# EAGLE board gps_fe_v2 (EAGLE 7.5.0)
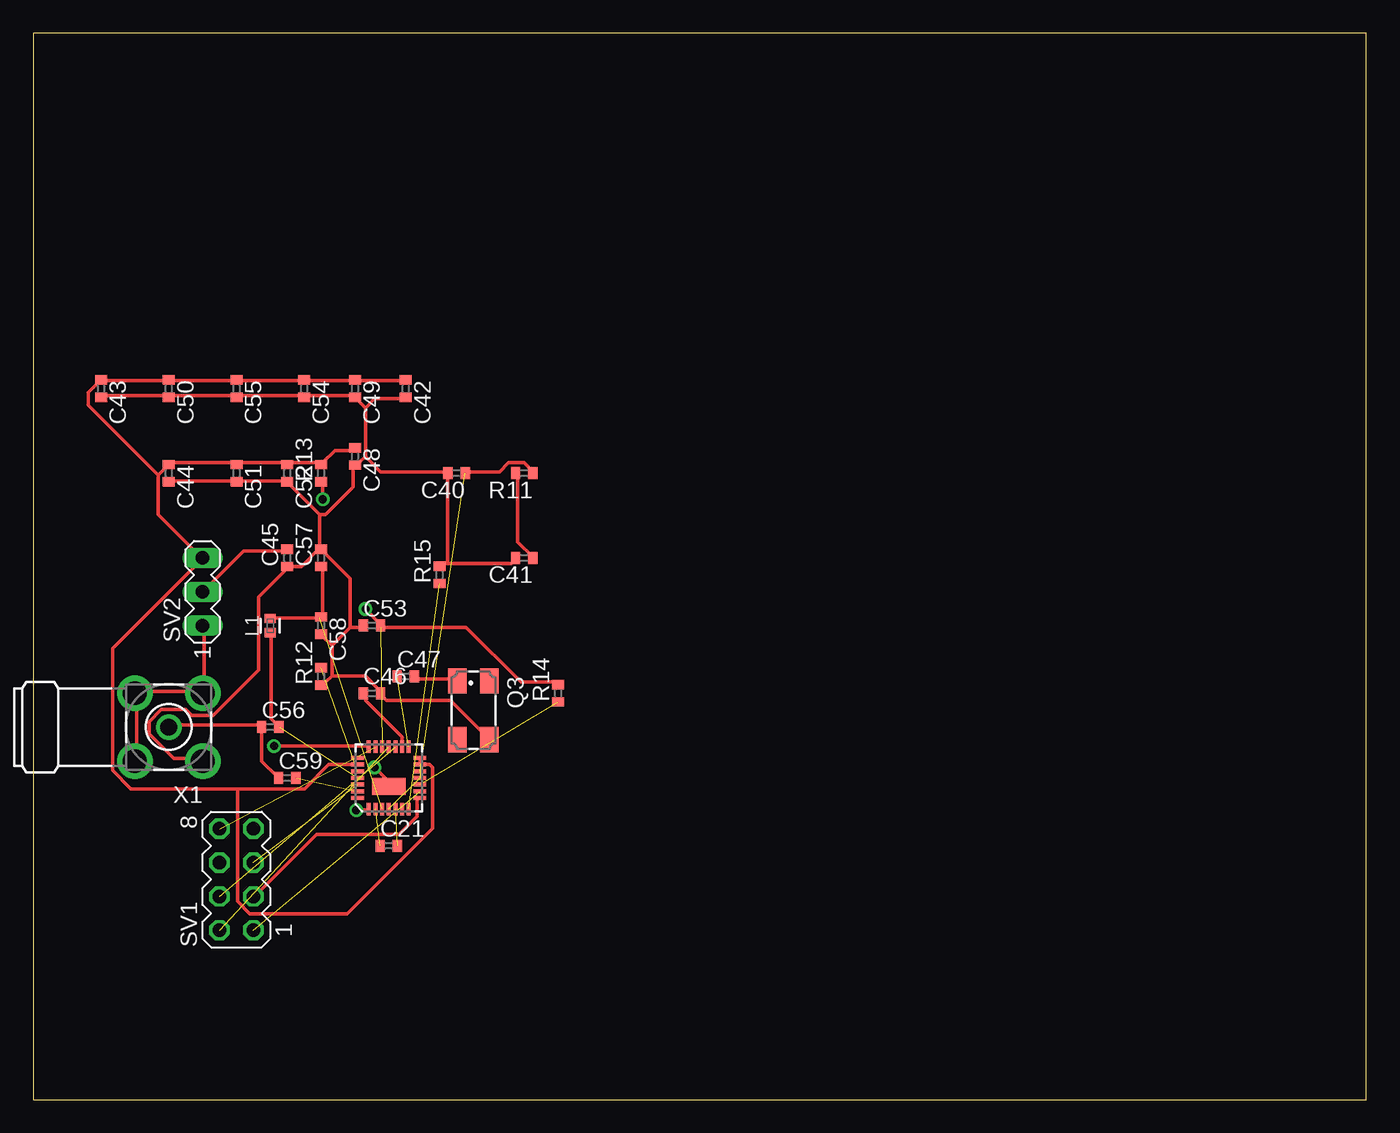
[diagram p0: board, top side]
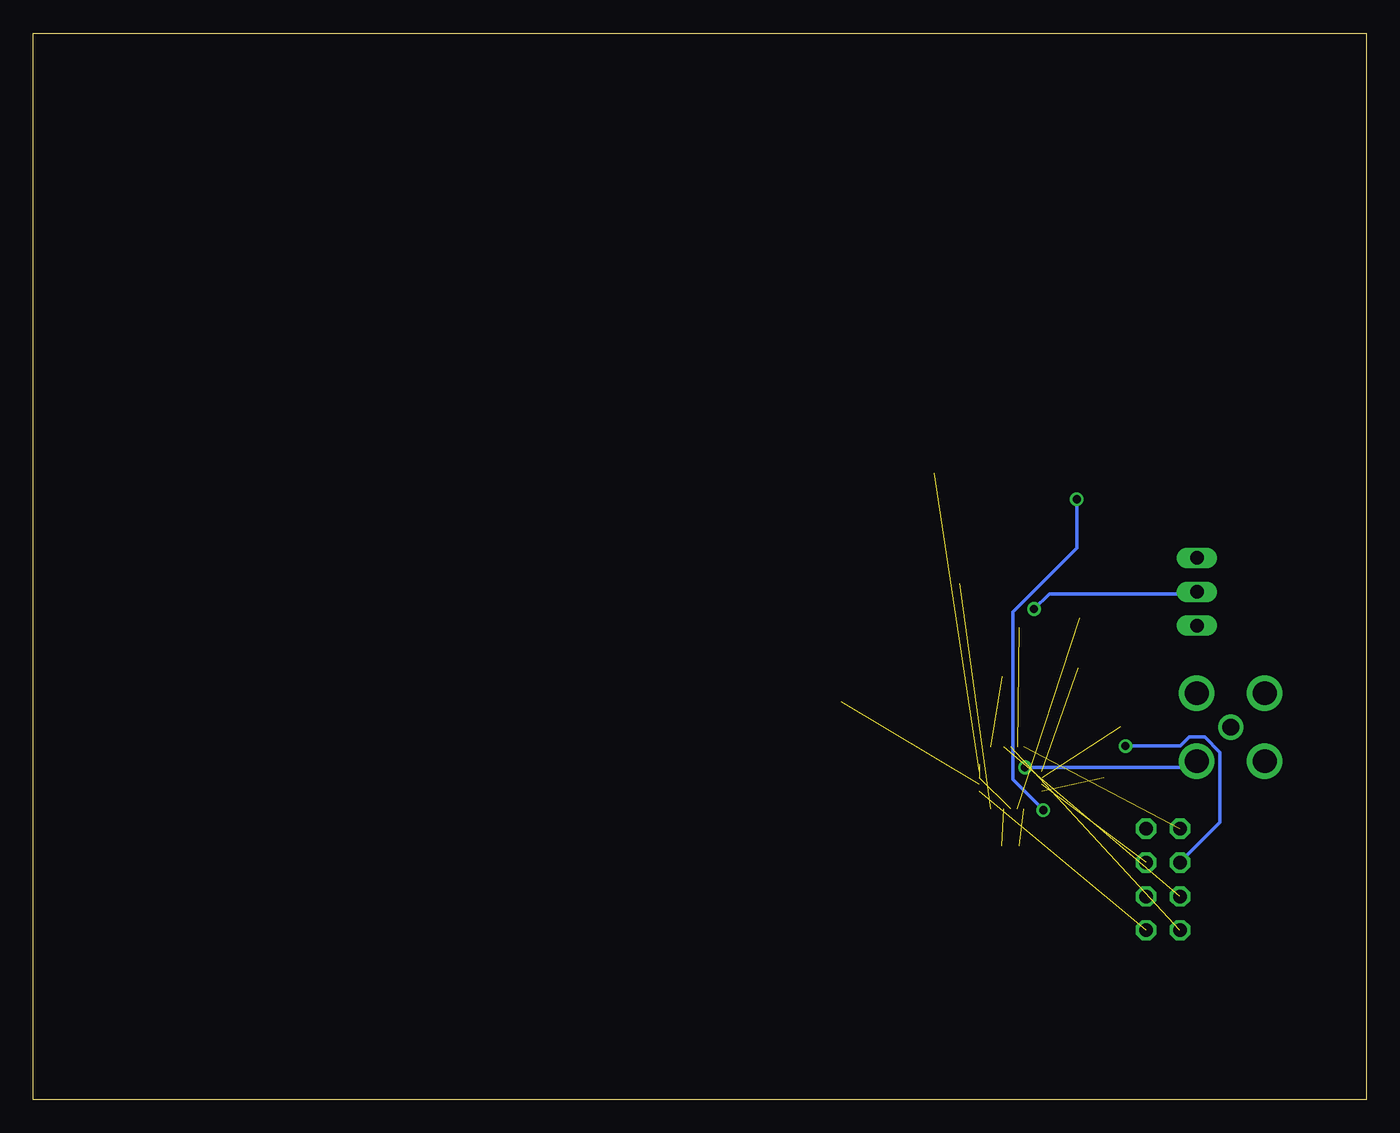
[diagram p1: board, bottom side, seen from below]

Size 100 x 80 mm. Coordinates in mm from the lower left corner, seen from the top.
Outline: 0,0 100,0 100,80 0,80 0,0
Copper layers (1*16): Top 0.035mm / dielectric 1.5mm / Bottom 0.035mm
Design rules "default": minimum track width 10mil, minimum drill 24mil, track to track 8mil, track to pad 8mil, pad to pad 8mil, via to via 8mil, smd to smd 8mil, copper to edge 40mil, drill to drill 8mil, minimum pad ring 10mil, minimum via ring 8mil, stop-mask expansion 4mil, vias tented up to drill 0mil, thermal gap 10mil

## Footprints (pad centres in the part's own frame; a part is rotated, then mirrored left to right if it is on the bottom)
C0402 = smd 0.7 x 0.9: 1 -0.65,0; 2 0.65,0
0402-A = smd 0.69 x 0.82: 1 -0.53,0; 2 0.53,0
CTS406 = smd 1.9 x 1.4: 1 -2.2,-1.2; 2 2.2,-1.2; 3 2.2,1.2; 4 -2.2,1.2
R0402 = smd 0.7 x 0.9: 1 -0.65,0; 2 0.65,0
MA04-2 = drill 1.016 octagon: 1 -3.81,-1.27; 2 -3.81,1.27; 3 -1.27,-1.27; 4 -1.27,1.27; 5 1.27,-1.27; 6 1.27,1.27; 7 3.81,-1.27; 8 3.81,1.27
MA03-1 = drill 1.016 long: 1 -2.54,0; 2 0,0; 3 2.54,0
90-0023 = smd 0.3 x 0.95: 1 -1.5,-2.34; 2 -1,-2.34; 3 -0.5,-2.34; 4 0,-2.34; 5 0.5,-2.34; 6 1,-2.34; 7 1.5,-2.34; 15 1.5,2.34; 16 1,2.34; 17 0.5,2.34; 18 0,2.34; 19 -0.5,2.34; 20 -1,2.34; 21 -1.5,2.34 | smd 0.95 x 0.3: 8 2.34,-1.5; 9 2.34,-1; 10 2.34,-0.5; 11 2.34,0; 12 2.34,0.5; 13 2.34,1; 14 2.34,1.5; 22 -2.34,1.5; 23 -2.34,1; 24 -2.34,0.5; 25 -2.34,0; 26 -2.34,-0.5; 27 -2.34,-1; 28 -2.34,-1.5 | smd 2.54 x 1.27: BODY 0,-0.635
BU-SMA-H = drill 1.27: 1 0,0 | drill 1.778: 2 -2.55,2.55; 3 2.55,2.55; 4 2.55,-2.55; 5 -2.55,-2.55

## Placement (x,y rotation side)
C21  0.47nF  [C0402]  26.67,19.05 0 top
C40  27pF  [C0402]  31.75,46.99 180 top
C41  470pF  [C0402]  36.83,40.64 180 top
C42  0.1uF  [C0402]  27.94,53.34 270 top
C43  0.1nF  [C0402]  5.08,53.34 270 top
C44  0.1uF  [C0402]  10.16,46.99 270 top
C45  0.1uF  [C0402]  19.05,40.64 90 top
C46  10nF  [C0402]  25.4,30.48 0 top
C47  23pF  [C0402]  27.94,31.75 0 top
C48  0.1uF  [C0402]  24.13,48.26 270 top
C49  0.1nF  [C0402]  24.13,53.34 270 top
C50  0.1uF  [C0402]  10.16,53.34 270 top
C51  0.1nF  [C0402]  15.24,46.99 270 top
C52  0.1nF  [C0402]  19.05,46.99 270 top
C53  0.1nF  [C0402]  25.4,35.56 0 top
C54  0.1uF  [C0402]  20.32,53.34 270 top
C55  0.1nF  [C0402]  15.24,53.34 270 top
C56  6.8nF  [C0402]  17.78,27.94 0 top
C57  0.1uF  [C0402]  21.59,40.64 90 top
C58  0.1nF  [C0402]  21.59,35.56 270 top
C59  6.8nF  [C0402]  19.05,24.13 0 top
L1  33nH  [0402-A]  17.78,35.56 90 top
Q3  16.368MHz  [CTS406]  33.02,29.21 270 top
R11  20k  [R0402]  36.83,46.99 180 top
R12  20k  [R0402]  21.59,31.75 90 top
R13  20k  [R0402]  21.59,46.99 90 top
R14  20k  [R0402]  39.37,30.48 90 top
R15  20k  [R0402]  30.48,39.37 90 top
SV1  [MA04-2]  15.24,16.51 90 top
SV2  [MA03-1]  12.7,38.1 90 top
U2  MAX2769  [90-0023]  26.67,24.13 0 top
X1  BU-SMA-H  [BU-SMA-H]  10.16,27.94 180 top

## Library data of the parts
C21 C40-C59 R11-R15 = rcl
L1 = rcl_custom
Q3 = crystal; OC_FARNELL: unknown; OC_NEWARK: unknown
SV1 SV2 = con-lstb; OC_FARNELL: unknown; OC_NEWARK: unknown
U2 = wicker
X1 = con-coax; OC_FARNELL: unknown; OC_NEWARK: unknown

## Nets
3.3VA: C42.1 C43.1 C44.1 C48.1 C49.1 C50.1 C51.1 C52.1 C54.1 C55.1 R13.2 SV2.3 U2.4 U2.11 U2.13 U2.14 U2.23
3.3VD: C45.2 C53.2 R14.2 SV2.2 U2.19
ANTBIAS: C57.1 C58.1 L1.2 U2.3
ANTFLAG: R13.1 U2.1
BAR_GND: C40.2 C41.2 C42.2 C43.2 C44.2 C45.1 C46.2 C48.2 C49.2 C50.2 C51.2 C52.2 C53.1 C54.2 C55.2 C57.2 C58.2 Q3.3 R12.1 R15.2 U2.BODY X1.2
CLKOUT: C46.1 U2.16
CPOUT: C40.1 R11.1 U2.12
GND: SV2.1 X1.3 X1.4 X1.5
LNA3: C59.2 U2.27
LNA4: C56.2 L1.1 U2.25
LNAOUT1: C21.1 U2.2
N$1: SV1.5 U2.26
N$2: C41.1 R11.2
N$3: SV1.7
N$4: SV1.8 U2.20
N$5: SV1.6 U2.21
N$6: SV1.4 U2.17
N$7: R14.1 U2.10
N$8: SV1.2 U2.18
N$9: SV1.1 U2.9
N$10: SV1.3 U2.8
N$14: C47.2 Q3.1
N$15: C56.1 C59.1 X1.1
N$16: R15.1 U2.7
N$17: R12.2 U2.24
N$19: C21.2 U2.5
N$20: C47.1 U2.15

## Tracks (layer width: path | path; a pad name or v marks a point on that pad's centre or on a via)
3.3VA  (2 unrouted)
  Top 0.254: C42.1 27.89,53.95 24.23,53.95 C49.1 24,53.95 20.34,53.95 C54.1 20.12,53.95 15.32,53.95 C55.1 15.09,53.95 10.29,53.95 C50.1 10.06,53.95 5.26,53.95 C43.1 5.03,53.95 4.12,53.03 4.12,52.12 9.37,46.86 | C48.1 24,48.69 22.63,48.69 21.72,47.78 R13.2 21.49,47.78 19.2,47.78 C52.1 18.97,47.78 15.32,47.78 C51.1 15.09,47.78 10.29,47.78 C44.1 10.06,47.55 9.37,46.86 | 29.03,25.15 29.03,25.6 U2.14 | 15.32,23.32 7.32,23.32 5.94,24.69 5.94,33.83 12.57,40.46 SV2.3 12.57,40.69 9.37,43.89 9.37,46.86 | 15.32,23.32 20.34,23.32 22.17,25.15 24.23,25.15 U2.23 | 29.03,25.15 29.72,25.15 29.95,24.92 29.95,20.34 23.55,13.95 16.23,13.95 15.32,14.86 15.32,23.32 | 29.03,25.15 U2.13
3.3VD  (via drill 0.61)  (1 unrouted)
  Top 0.254: C45.2 18.97,41.15 15.77,41.15 12.8,38.18 SV2.2 | R14.2 39.32,31.32 36.58,31.32 32.46,35.43 26.06,35.43 C53.2 26.06,35.66 v24.92,36.8
  Bottom 0.254: v24.92,36.8 23.77,37.95 12.8,37.95 SV2.2
ANTBIAS  (1 unrouted)
  Top 0.254: L1.2 17.83,36.12 21.49,36.12 C58.1 21.72,36.35 21.72,39.78 C57.1
ANTFLAG  (via drill 0.61)
  Top 0.254: v21.72,45.03 21.72,46.18 R13.1 | v24.23,21.72 25.15,21.72 U2.1
  Bottom 0.254: v21.72,45.03 21.72,41.38 26.52,36.58 26.52,24 v24.23,21.72
BAR_GND  (via drill 0.61)
  Top 0.254: v25.6,24.92 26.52,24 26.52,23.55 U2.BODY | 22.4,31.77 21.95,31.32 21.72,31.32 R12.1 | 22.4,34.06 22.4,31.77 | 22.4,34.06 21.72,34.75 C58.2 | 23.77,35.43 24.69,35.43 C53.1 | 22.4,34.06 23.77,35.43 | 22.4,31.77 24.92,31.77 25.83,30.86 25.83,30.63 C46.2 26.06,30.4 26.52,29.95 31.32,29.95 34.06,27.2 Q3.3 | 21.49,41.38 20.12,40.01 19.2,40.01 C45.1 18.97,39.78 16.92,37.72 16.92,32.23 13.49,28.8 11.89,28.8 11.43,29.26 9.6,29.26 8.69,28.35 8.69,27.43 10.52,25.6 12.57,25.6 X1.2 | C44.2 10.29,46.41 15.09,46.41 C51.2 15.32,46.41 18.97,46.41 C52.2 19.2,46.18 21.49,43.89 | 21.49,43.89 21.49,41.38 | 21.49,41.38 C57.2 21.72,41.15 23.77,39.09 23.77,35.43 | 31.09,40.23 35.89,40.23 36.12,40.46 C41.2 | 31.09,40.23 30.63,40.23 R15.2 | 31.09,40.23 31.09,46.86 C40.2 31.09,47.09 26.06,47.09 24.92,48.23 | 24.92,48.23 24.46,47.78 24.23,47.78 C48.2 24,47.55 24,45.95 21.95,43.89 21.49,43.89 | 24.92,51.89 24.92,48.23 | 24.92,51.89 24.23,52.58 C49.2 24,52.81 20.34,52.81 C54.2 20.12,52.81 15.32,52.81 C55.2 15.09,52.81 10.29,52.81 C50.2 10.06,52.81 5.26,52.81 C43.2 | 24.92,51.89 25.6,52.58 27.89,52.58 C42.2
  Bottom 0.254: v25.6,24.92 13.26,24.92 12.8,25.38 X1.2
CLKOUT
  Top 0.254: C46.1 24.92,30.4 24.92,29.95 27.66,27.2 27.66,26.52 U2.16
CPOUT  (1 unrouted)
  Top 0.254: C40.1 32.46,47.09 34.98,47.09 35.66,47.78 36.8,47.78 37.49,47.09 R11.1
GND
  Top 0.254: SV2.1 12.8,35.43 12.8,30.63 X1.5 12.57,30.63 7.77,30.63 X1.4 7.77,30.4 7.77,25.6 X1.3
LNA3  (1 unrouted)
LNA4  (1 unrouted)
  Top 0.254: L1.1 17.83,34.98 17.83,28.57 18.29,28.12 C56.2
LNAOUT1  (1 unrouted)
N$1  (1 unrouted)
N$2
  Top 0.254: R11.2 36.35,46.86 36.35,41.83 37.49,40.69 C41.1
N$4  (1 unrouted)
N$5  (via drill 0.61)
  Top 0.254: v18.06,26.52 25.15,26.52 U2.21
  Bottom 0.254: v18.06,26.52 13.95,26.52 13.26,27.2 12.12,27.2 10.97,26.06 10.97,20.8 13.95,17.83 SV1.6
N$6  (1 unrouted)
N$7  (1 unrouted)
N$8  (1 unrouted)
N$9  (1 unrouted)
N$10
  Top 0.254: U2.8 28.8,22.63 28.8,21.26 27.43,19.89 21.26,19.89 16.69,15.32 SV1.3
N$14
  Top 0.254: C47.2 28.8,31.55 31.77,31.55 Q3.1
N$15
  Top 0.254: C59.1 18.29,24.23 17.14,25.38 17.14,27.89 C56.1 16.92,28.12 10.29,28.12 X1.1
N$16  (1 unrouted)
N$17  (1 unrouted)
N$19  (1 unrouted)
N$20  (1 unrouted)